# Altium PCB CP2102.PCBDOC
Units mm, origin at the board's own origin, x right, y up, seen from the top; angles counter-clockwise.
Board outline 33.57 x 19.1 mm, 2 copper layers (Top Layer, Bottom Layer); 12 components, 0 nets, 59 pads, 4 vias.
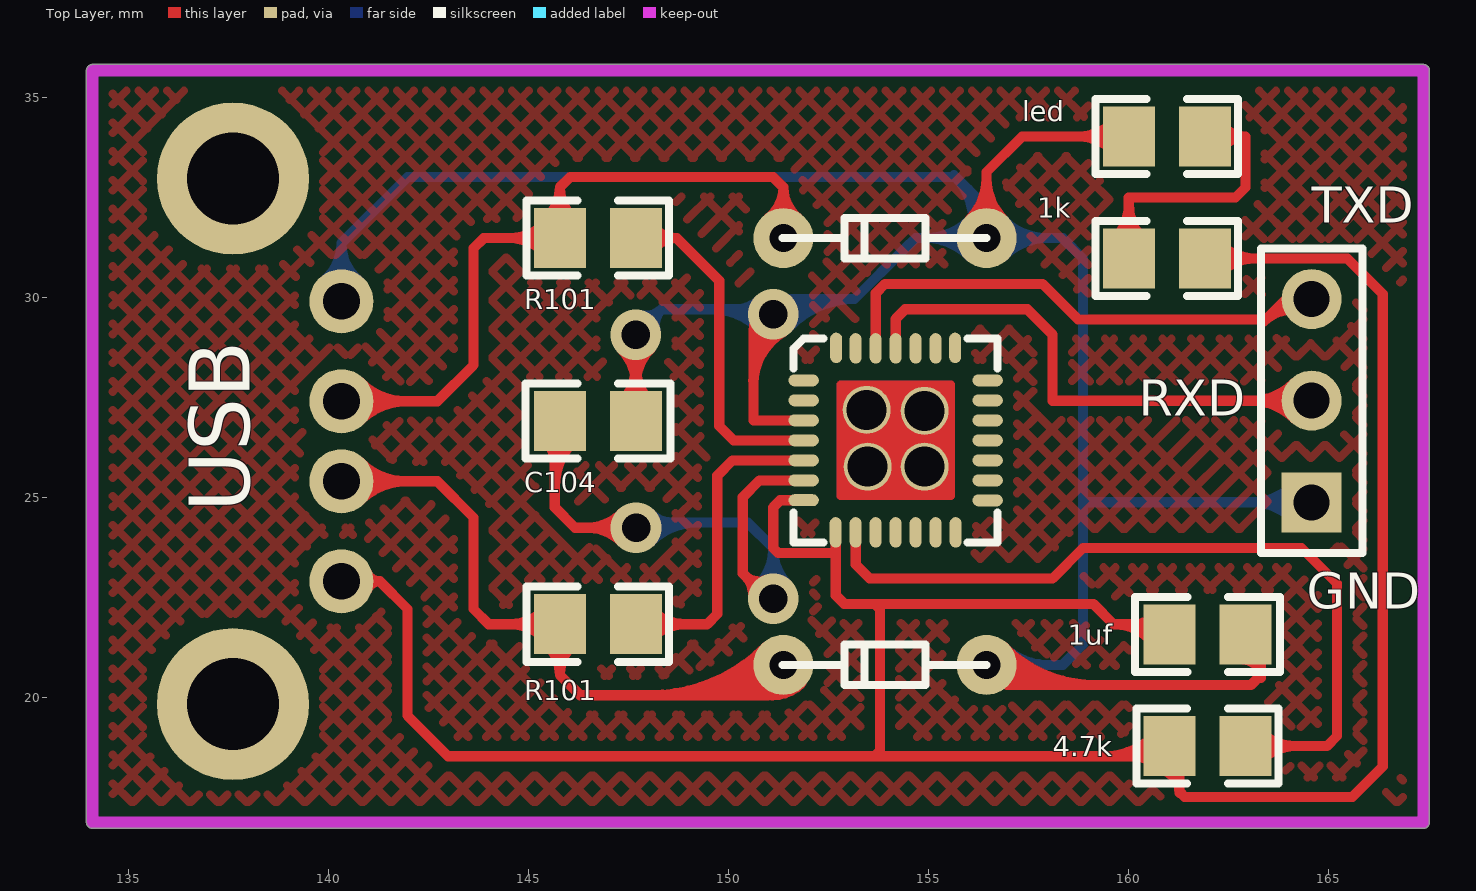
[diagram p0: Top Layer view]
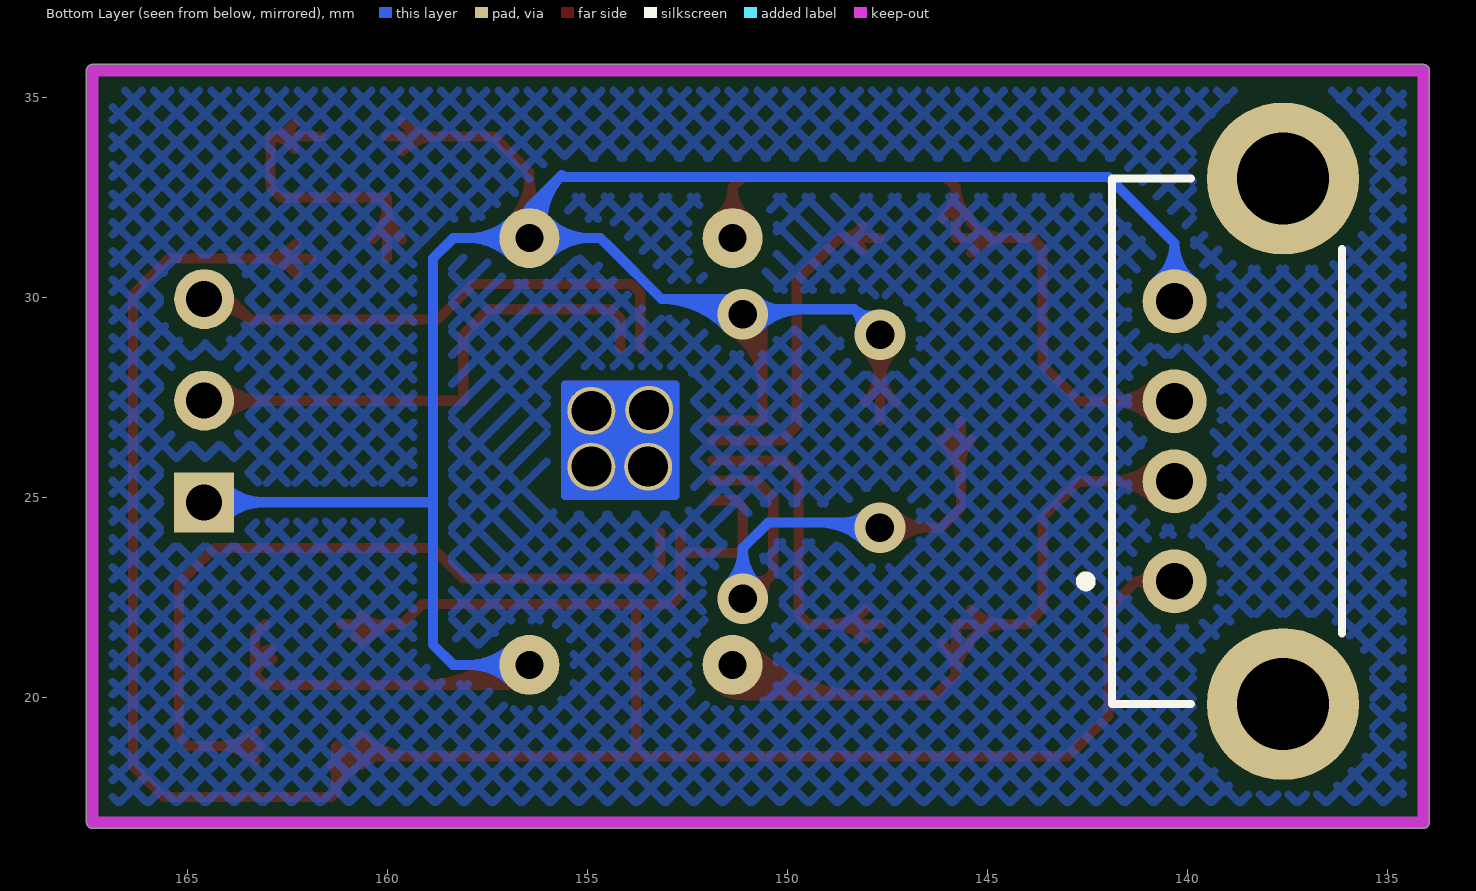
[diagram p1: Bottom Layer view, seen from below]

## Layer stack, top to bottom
Top Layer: signal copper 0.0356
Dielectric: dielectric 0.32, FR-4, Dk 4.8
Bottom Layer: signal copper 0.0356

## Board outline
133.962,16.891 ccw(c134.112,16.891) 134.112,16.741 167.386,16.741 ccw(c167.386,16.891) 167.536,16.891 167.536,35.687 ccw(c167.386,35.687) 167.386,35.837 134.112,35.837 ccw(c134.112,35.687) 133.962,35.687

## Design rules (kind name [scope] priority, off if disabled: settings)
Clearance [All] p1: gap=0.254
ComponentClearance [All] p1: gap=0.254 collisioncheckmode=3 verticalgap=0.254
PolygonConnect [All] p1: connectstyle=Relief reliefconductorwidth=0.254 reliefentries=4 polygonreliefangle="90 Angle"
RoutingVias [All] p1: holewidth=0.711 width=1.27 viastyle="Through Hole" minholewidth=0.711 minwidth=1.27 maxholewidth=0.711 maxwidth=1.27
SolderMaskExpansion [All] p1: expansion=0.102
TestPointUsage [All] p1: valid=0 allowmultiple=FALSE
Testpoint [All] p1: side=15 testpointundercomponent=TRUE minsize=1.016 maxsize=2.54 preferedsize=1.524 minholesize=0 maxholesize=1.016 preferedholesize=0.813 testpointgrid=0.025 style=1023 order=0-112345678
Width [All] p1: maxlimit=0.254 minlimit=0.254 preferedwidth=0.254
17 further rules are at their usual default settings.

## Components (designator, comment, footprint, x,y, rotation, side; value= is the part's Value field where it differs from the comment)
1k "Comment" R-0805 160.02,30.988 r0 top
1uf "Comment" C-0805 162.941,21.59 r180 top
4.7k "Comment" R-0805 161.036,18.796 r0 top
C104 "Comment" C-0805 145.796,26.924 r0 top
led "Comment" R-0805 160.02,34.036 r0 top
R101 "Comment" R-0805 145.796,21.844 r0 top
R101 "Comment" R-0805 145.796,31.496 r0 top
? "Comment" LCC28 151.892,27.94 r0 top
? "Comment" HDR1X3 164.592,24.892 r90 top
? "Comment" D-3 156.464,31.496 r180 top
? "Comment" D-3 156.464,20.828 r180 top
? "Comment" USB2.5-2V4A 136.144,26.416 r180 bottom

## Footprints (in the part's own frame and the unit in brackets; to place one, negate y for a bottom-side part, rotate by r counter-clockwise, add the part's x,y. Pads: shape width x height; smd on the part's side, far side on the other; paste and mask are expansions set on the pad)
C-0805 [mm]
  rect 1.3x1.5 smd: 1(0,0) 2(1.9,0)
  silkscreen extent -0.85,-0.94 2.77,0.94
D-3 [mm]
  round 1.5 hole 0.7: A(0,0) K(5.08,0)
  silkscreen extent 0,-0.51 5.1,0.51
HDR1X3 [mm] "Connector; Header; 3 Position"
  rect 1.5x1.5 hole 0.9: 1(0,0)
  round 1.5 hole 0.9: 2(2.54,0) 3(5.08,0)
  silkscreen extent -1.27,-1.27 6.35,1.27
LCC28 [mm]
  oval 0.76x0.3 smd: 1(0,0) 2(0,-0.5) 3(0,-1) 4(0,-1.5) 5(0,-2) 6(0,-2.5) 7(0,-2.997) 15(4.6,-3) 16(4.6,-2.5) 17(4.6,-2) 18(4.6,-1.5) 19(4.6,-1) 20(4.6,-0.5) 21(4.6,0)
  oval 0.3x0.76 smd: 8(0.8,-3.8) 9(1.3,-3.8) 10(1.8,-3.8) 11(2.3,-3.8) 12(2.8,-3.8) 13(3.3,-3.8) 14(3.8,-3.8) 22(3.785,0.813) 23(3.3,0.8) 24(2.8,0.8) 25(2.3,0.8) 26(1.8,0.8) 27(1.3,0.8) 28(0.813,0.813)
  round 1.2 hole 1: 29(1.575,-0.737) 30(3.023,-0.762) 31(3.023,-2.159) 32(1.6,-2.159)
  Multi-Layer region: 0.914,-2.896 3.683,-2.896 3.683,-0.102 0.914,-0.102
  Multi-Layer lines w0.2: 0.914,-2.438 0.914,-2.464 1.346,-2.896 ; 0.914,-2.337 0.914,-2.362 1.448,-2.896 ; 0.914,-1.854 1.346,-1.422 ; 0.914,-1.372 2.083,-1.372 ; 0.914,-1.092 1.016,-1.092 ; 0.914,-0.965 0.914,-0.991 1.016,-1.092 ; 0.914,-0.559 0.914,-0.508 1.321,-0.102 ; 1.016,-1.651 1.016,-1.549 1.194,-1.372 ; 1.067,-0.254 1.067,-0.102 ; 1.097,-1.672 1.198,-1.672 ; 1.157,-2.707 1.132,-2.707 ; 1.168,-2.896 0.914,-2.642 0.914,-2.286 1.071,-2.443 1.071,-2.646 ; 1.202,-2.752 1.871,-2.752 2.134,-2.489 2.21,-2.489 ; 1.221,-1.624 1.297,-1.624 1.499,-1.422 ; 1.249,-2.646 1.071,-2.646 ; 1.361,-1.483 1.814,-1.483 2.235,-1.905 ; 1.473,-1.372 1.016,-1.829 1.016,-2.007 1.016,-1.092 ; 1.651,-1.422 1.702,-1.372 1.905,-1.168 ; 1.803,-2.845 2.21,-2.438 2.21,-2.362 ; 1.829,-1.372 1.88,-1.372 2.21,-1.041 ; 1.905,-0.102 1.905,-0.152 2.311,-0.559 ; 2.108,-0.102 2.108,-0.254 2.184,-0.33 ; 2.159,-1.626 2.083,-1.626 1.88,-1.422 ; 2.184,-2.896 2.395,-2.896 2.586,-2.755 3.498,-2.755 ; 2.21,-2.845 2.21,-0.102 ; 2.21,-2.616 2.007,-2.616 ; 2.362,-2.896 2.362,-0.152 2.769,-0.152 2.819,-0.102 ; 2.362,-2.515 2.464,-2.515 ; 2.362,-2.464 2.286,-2.464 1.905,-2.845 ; 2.362,-2.362 2.362,-2.667 2.54,-2.845 ; 2.362,-2.337 2.464,-2.438 ; 2.362,-2.286 2.464,-2.388 2.464,-2.438 ; 2.362,-2.235 2.362,-2.388 1.905,-2.845 ; 2.362,-1.93 2.492,-1.724 2.362,-1.803 ; 2.362,-1.905 2.362,-1.854 2.769,-1.448 ; 2.362,-1.372 2.692,-1.372 ; 2.362,-1.346 2.743,-1.346 2.87,-1.346 ; 2.362,-1.168 2.489,-1.168 ; 2.362,-0.965 2.845,-1.448 ; 2.362,-0.914 2.362,-1.041 ; 2.362,-0.635 2.362,-0.483 2.743,-0.102 ; 2.362,-0.457 2.362,-0.356 2.616,-0.102 ; 2.413,-2.845 2.413,-2.743 2.362,-2.692 2.667,-2.692 2.819,-2.845 3.353,-2.845 ; 2.455,-0.389 2.455,-0.44 2.362,-0.533 2.362,-1.041 ; 2.525,-1.692 2.601,-1.692 2.845,-1.448 ; 2.794,-2.845 2.464,-2.515 ; 3.15,-1.524 3.302,-1.524 3.683,-1.905 ; 3.15,-1.448 3.327,-1.448 3.683,-1.803 ; 3.2,-2.896 3.683,-2.413 3.683,-1.93 ; 3.226,-0.102 3.48,-0.356 ; 3.251,-0.102 3.302,-0.102 3.683,-0.483 ; 3.277,-1.372 3.683,-0.965 3.683,-0.813 ; 3.404,-1.524 2.692,-1.524 2.21,-1.524 2.108,-1.422 1.88,-1.422 ; 3.479,-1.599 3.479,-1.752 3.683,-1.956 ; 3.48,-0.102 3.48,-0.356 ; 3.505,-0.102 3.683,-0.279 3.683,-1.092 3.658,-1.092 3.302,-1.448 ; 3.531,-2.591 3.683,-2.591 ; 3.599,-2.896 3.683,-2.896 ; 3.658,-0.533 3.48,-0.356 ; 3.683,-2.515 3.353,-2.845 ; 3.683,-2.337 3.498,-2.522 3.498,-2.755 ; 3.683,-1.651 3.683,-1.626 3.505,-1.448 2.845,-1.448 ; 3.683,-1.448 3.302,-1.448 ; 3.683,-1.219 3.531,-1.372 2.692,-1.372 ; 1.016,-1.092 1.346,-1.422 ; 1.071,-2.646 1.132,-2.707 ; 1.132,-2.707 1.31,-2.707 1.448,-2.845 3.353,-2.845 ; 1.346,-1.422 1.88,-1.422 ; 1.905,-2.845 1.905,-2.718 2.007,-2.616 ; 2.007,-2.616 1.778,-2.845 2.007,-2.616 ; 2.362,-1.041 2.692,-1.372 ; 2.362,-1.041 2.489,-1.168 ; 2.464,-2.515 2.464,-2.438 ; 2.489,-1.168 2.769,-1.448 ; 2.769,-1.448 3.302,-1.448 ; 2.845,-1.448 3.302,-1.448 ; 3.498,-2.755 3.683,-2.889 3.683,-2.896 ; 3.683,-2.896 3.683,-0.102 0.914,-0.102 0.914,-2.896 3.683,-2.896
  silkscreen extent -0.25,-4.05 4.85,1.05
R-0805 [mm]
  rect 1.3x1.5 smd: 1(0,0) 2(1.9,0)
  silkscreen extent -0.83,-0.94 2.73,0.94
USB2.5-2V4A [mm] "Connector; USB1.1, Type A, Thru-Hole; 4 Position; Vertical"
  round 1.6 hole 0.92: 1(-4.19,-3.5) 2(-4.19,-1) 3(-4.19,1) 4(-4.19,3.5)
  round 3.8 hole 2.3: 5(-1.48,6.57) 6(-1.48,-6.57)
  silkscreen extent -6.54,-6.57 0,6.57

## Via types
v1: diameter 1.27, hole 0.711, Top Layer to Bottom Layer, 4 vias

## Nets (pads, with @x,y where several pads share a name; then routed paths per layer and width w, separated by ;. In a path a pad name is that pad's centre, name@x,y a point inside that pad or via, vN(x,y) a via of type N, cw(c..) or ccw(c..) an arc to the next point about the centre after c; other vN are vias at no path point)
pads on no net: 1k.1 1k.2 1uf.1 1uf.2 4.7k.1 4.7k.2 ?.1 ?.2 ?.3 ?.4 ?.5 ?.6 ?.7 ?.8 ?.9 ?.10 ?.11 ?.12 ?.13 ?.14 ?.15 ?.16 ?.17 ?.18 ?.19 ?.20 ?.21 ?.22 ?.23 ?.24 ?.25 ?.26 ?.27 ?.28 ?.29 ?.30 ?.31 ?.32 ?.A ?.K C104.1 C104.2 led.1 led.2 R101.1 R101.2
copper on no net: | length 372.3
  Top Layer w0.254: 140.334,22.916 141.295,22.916 ; 140.334,25.416 142.224,25.416 142.732,25.416 143.637,24.511 143.637,22.225 144.018,21.844 145.796,21.844 145.796,20.574 ; 140.334,27.416 142.224,27.416 142.732,27.416 143.637,28.321 143.637,31.242 143.891,31.496 145.796,31.496 145.796,32.766 ; 140.63,25.12 cw(c141.346,24.404) 141.346,25.416 cw(c141.346,26.428) 140.63,25.712 ; 140.63,27.12 cw(c141.346,26.404) 141.346,27.416 cw(c141.346,28.428) 140.63,27.712 ; 140.81,24.94 cw(c141.959,23.791) 141.959,25.416 cw(c141.959,27.041) 140.81,25.892 ; 140.81,26.94 cw(c141.959,25.791) 141.959,27.416 cw(c141.959,29.041) 140.81,27.892 ; 140.966,22.686 cw(c141.295,22.566) 141.295,22.916 ; 140.966,23.146 ccw(c141.295,23.266) 141.295,22.916 ; 145.426,21.474 ccw(c144.533,20.581) 144.533,21.844 ccw(c144.533,23.107) 145.426,22.214 ; 145.426,26.454 cw(c144.84,25.868) 145.669,25.868 cw(c146.752,25.868) 145.986,26.634 ; 145.426,31.126 ccw(c144.533,30.233) 144.533,31.496 ccw(c144.533,32.759) 145.426,31.866 ; 145.447,21.354 cw(c144.749,20.574) 145.796,20.574 ; 145.447,31.986 ccw(c144.749,32.766) 145.796,32.766 ; 145.669,25.255 cw(c147.365,25.255) 146.166,26.454 ; 145.669,26.924 145.669,24.765 146.177,24.257 v1(147.701,24.257) ; 146.145,21.354 ccw(c146.843,20.574) 145.796,20.574 ; 146.145,31.986 cw(c146.843,32.766) 145.796,32.766 ; 147.326,27.394 ccw(c146.433,28.287) 147.696,28.287 ccw(c148.959,28.287) 148.066,27.394 ; v1@147.337,28.719 cw(c146.47,27.852) 147.696,27.852 cw(c148.922,27.852) v1@148.055,28.719 ; v1@147.342,23.898 ccw(c146.475,23.031) 146.475,24.257 ccw(c146.475,25.483) v1@147.342,24.616 ; 147.696,21.844 149.479,21.844 149.733,22.098 149.733,25.559 150.114,25.94 151.892,25.94 ; 147.696,26.924 v1(147.696,29.078) ; 147.696,31.496 148.717,31.496 ; 148.04,20.066 ccw(c148.04,24.172) 150.943,21.269 ; 148.066,21.474 cw(c148.959,20.581) 148.959,21.844 cw(c148.959,23.107) 148.066,22.214 ; 148.12,31.19 cw(c148.717,30.761) 148.717,31.496 ; 148.12,31.802 ccw(c148.717,32.231) 148.717,31.496 ; 148.654,20.066 ccw(c148.654,23.558) 151.123,21.089 ; 149.267,20.066 ccw(c149.267,22.945) 151.303,20.909 ; 149.88,20.066 ccw(c149.88,22.332) 151.482,20.73 ; 150.493,20.066 ccw(c150.493,21.719) 151.662,20.55 ; 150.622,27.94 150.638,27.924 ; v1@150.624,22.523 ccw(c149.961,22.58) 150.432,23.05 ccw(c150.761,23.38) v1@150.937,22.949 ; 150.638,27.853 cw(c152.14,27.853) v1@151.385,29.152 ; 150.638,28.294 cw(c151.884,28.294) v1@151.258,29.371 ; 150.638,28.736 cw(c151.627,28.736) v1(151.13,29.591) 150.638,29.099 ; 150.638,29.177 cw(c151.37,29.177) v1@151.002,29.811 ; v1@150.678,29.358 cw(c150.481,29.256) 150.638,29.099 ; v1@150.749,22.733 150.368,23.114 150.368,25.019 150.789,25.44 151.892,25.44 ; v1@150.897,29.139 ccw(c150.795,28.942) 150.638,29.099 ; 151.003,31.989 ccw(c150.401,32.766) 151.384,32.766 ; 151.106,20.066 ccw(c151.106,21.106) 151.841,20.371 ; 151.158,31.788 ccw(c150.802,32.248) 151.384,32.248 ccw(c151.966,32.248) 151.61,31.788 ; 151.384,20.828 151.384,20.447 151.003,20.066 146.304,20.066 145.796,20.574 ; 151.384,31.496 151.384,32.766 ; 151.765,31.989 cw(c152.367,32.766) 151.384,32.766 ; 151.892,24.943 151.308,24.943 151.13,24.765 151.13,23.749 151.257,23.622 152.4,23.622 152.692,23.622 ; 151.892,26.44 150.138,26.44 149.781,26.797 149.781,30.432 148.717,31.496 ; 151.892,26.94 150.638,26.94 150.638,27.924 ; 152.692,22.949 152.692,24.14 ; 152.692,23.114 152.692,22.568 152.908,22.352 155.067,22.352 159.131,22.352 159.639,21.844 ; 153.192,24.14 153.192,23.338 153.543,22.987 158.115,22.987 158.877,23.749 160.782,23.749 163.068,23.749 ; 153.67,22.352 153.797,22.225 153.797,21.844 153.797,19.05 153.797,18.669 ; 153.692,28.74 153.692,30.121 153.924,30.353 157.861,30.353 158.75,29.464 163.449,29.464 163.957,29.972 164.592,29.972 ; 154.192,28.74 154.192,29.478 154.432,29.718 157.48,29.718 158.115,29.083 158.115,27.432 164.592,27.432 ; 156.023,31.937 ccw(c154.96,33) 156.464,33 ccw(c157.968,33) 156.905,31.937 ; 156.203,31.757 ccw(c155.573,32.387) 156.464,32.387 ccw(c157.355,32.387) 156.725,31.757 ; 156.366,20.73 ccw(c157.355,21.719) 157.355,20.32 ; 156.464,20.828 156.972,20.32 163.068,20.32 163.322,20.574 163.322,21.59 163.068,21.844 ; 156.464,31.496 156.464,33.147 157.353,34.036 160.02,34.036 ; 156.545,20.909 ccw(c157.968,22.332) 157.968,20.32 ; 156.725,21.089 ccw(c158.581,22.945) 158.581,20.32 ; 156.905,21.269 ccw(c159.194,23.558) 159.194,20.32 ; 159.402,18.542 ccw(c159.402,20.33) 160.666,19.066 ; 159.65,31.458 ccw(c158.757,32.351) 160.02,32.351 ccw(c161.283,32.351) 160.39,31.458 ; 159.65,33.666 ccw(c158.757,32.773) 158.757,34.036 ccw(c158.757,35.299) 159.65,34.406 ; 160.015,18.542 ccw(c160.015,19.717) 160.846,18.886 ; 160.02,30.988 160.02,32.512 161.417,32.512 161.798,32.512 162.687,32.512 162.936,32.761 162.936,34.036 ; 160.145,18.542 cw(c160.145,17.805) 160.666,18.326 ; 160.15,21.844 ccw(c160.15,22.581) 160.671,22.06 ; 160.165,21.844 cw(c160.165,20.995) 160.83,21.523 ; 160.631,21.365 ccw(c159.639,20.577) 159.639,21.844 ; 160.873,18.199 cw(c160.683,17.623) 161.29,17.623 ; 160.952,18.44 cw(c160.798,17.973) 161.29,17.973 ; 161.168,21.844 159.639,21.844 ; 161.29,18.047 cw(c161.685,18.047) 161.406,18.326 ; 161.671,34.036 162.936,34.036 ; 161.92,30.988 165.481,30.988 166.37,30.099 166.37,18.288 165.608,17.526 161.417,17.526 161.29,17.653 161.29,18.796 161.036,18.542 153.67,18.542 ; 162.29,30.618 cw(c163.183,29.725) 163.183,30.988 cw(c163.183,32.251) 162.29,31.358 ; 162.346,33.732 cw(c162.936,33.311) 162.936,34.036 ; 162.346,34.34 ccw(c162.936,34.761) 162.936,34.036 ; 162.893,20.969 cw(c162.849,20.498) 163.322,20.498 ; 162.916,21.222 cw(c162.875,20.777) 163.322,20.777 ; 163.19,18.796 164.973,18.796 165.227,19.05 165.227,22.86 164.338,23.749 163.068,23.749 ; 163.195,23.749 163.068,23.749 ; 163.306,18.426 cw(c164.199,17.533) 164.199,18.796 cw(c164.199,20.059) 163.306,19.166 ; 163.402,29.417 cw(c164.088,28.732) 164.453,29.63 ; 163.673,29.688 cw(c164.245,29.117) 164.549,29.865 ; 164.151,26.991 ccw(c163.088,25.928) 163.088,27.432 ccw(c163.088,28.936) 164.151,27.873 ; 164.331,27.171 ccw(c163.701,26.541) 163.701,27.432 ccw(c163.701,28.323) 164.331,27.693 ; 141.295,22.916 141.986,22.225 141.986,19.558 143.002,18.542 153.289,18.542 153.67,18.542 ; 145.796,32.766 146.05,33.02 151.13,33.02 151.384,32.766 ; 150.638,27.924 150.638,29.099 ; 153.67,18.542 153.797,18.669 ; 153.67,18.542 153.797,18.669
  Bottom Layer w0.254: 139.899,30.43 ccw(c139.104,31.368) 140.334,31.368 ; 140.063,30.236 ccw(c139.568,30.82) 140.334,30.82 ccw(c141.1,30.82) 140.605,30.236 ; 140.334,29.916 140.334,31.368 ; 140.769,30.43 cw(c141.564,31.368) 140.334,31.368 ; v1(147.696,29.078) 148.336,29.718 ; v1(147.701,24.257) 147.828,24.384 150.495,24.384 151.13,23.749 v1(151.13,22.479) ; v1@147.816,29.572 ccw(c147.945,30.108) 148.336,29.718 ; v1@147.881,24.077 cw(c148.621,23.337) 148.621,24.384 cw(c148.621,25.177) v1@148.06,24.616 ; v1@148.06,23.898 cw(c149.234,22.724) 149.234,24.384 ; v1@148.19,29.198 cw(c148.726,29.327) 148.336,29.718 ; 149.597,29.718 cw(c149.597,28.058) v1@150.771,29.232 ; v1@150.771,22.838 ccw(c149.904,23.705) 151.13,23.705 ccw(c152.356,23.705) v1@151.489,22.838 ; v1@150.771,29.95 cw(c150.21,30.511) 150.21,29.718 cw(c150.21,28.671) v1@150.95,29.411 ; v1@151.317,29.419 cw(c152.581,28.25) 152.581,29.972 ; v1@151.503,29.246 cw(c153.162,27.713) 153.162,29.972 ; 152.001,29.972 ccw(c152.001,28.786) v1(151.13,29.591) ; 155.654,33.068 cw(c154.49,31.903) 156.103,31.571 ; 155.987,32.735 cw(c155.042,31.789) 156.351,31.519 ; 156.023,31.055 ccw(c154.96,29.992) 154.96,31.496 ccw(c154.96,33) 156.023,31.937 ; 156.203,31.235 ccw(c155.573,30.605) 155.573,31.496 ccw(c155.573,32.387) 156.203,31.757 ; 156.321,32.401 cw(c155.595,31.675) 156.6,31.468 ; 156.34,32.107 ccw(c156.31,32.258) 156.464,32.258 ; 156.464,20.828 158.115,20.828 158.369,20.828 158.877,21.336 158.877,21.59 158.877,30.226 158.877,30.988 158.369,31.496 156.464,31.496 ; 156.588,32.107 cw(c156.618,32.258) 156.464,32.258 ; 156.725,20.567 cw(c157.355,19.937) 157.355,20.828 cw(c157.355,21.719) 156.725,21.089 ; 156.725,31.235 cw(c157.355,30.605) 157.355,31.496 cw(c157.355,32.387) 156.725,31.757 ; 156.905,20.387 cw(c157.968,19.324) 157.968,20.828 cw(c157.968,22.332) 156.905,21.269 ; 156.905,31.055 cw(c157.968,29.992) 157.968,31.496 cw(c157.968,33) 156.905,31.937 ; 158.877,24.892 164.592,24.892 ; 164.151,24.451 ccw(c163.088,23.388) 163.088,24.892 ccw(c163.088,26.396) 164.151,25.333 ; 164.331,24.631 ccw(c163.701,24.001) 163.701,24.892 ccw(c163.701,25.783) 164.331,25.153 ; 140.334,31.368 141.986,33.02 155.702,33.02 156.464,32.258 ; 148.336,29.718 151.003,29.718 v1(151.13,29.591) ; v1(151.13,29.591) 151.511,29.972 153.162,29.972 ; 153.162,29.972 154.432,31.242 154.686,31.496 156.464,31.496 ; 156.464,31.496 156.464,32.258

## Polygon pours and split planes (outlines as drawn)
no net on Top Layer (hatched 45Degree grid 0.508 track 0.203): 134.62,35.179 134.62,17.399 166.878,17.399 166.878,35.179
no net on Bottom Layer (hatched 45Degree grid 0.508 track 0.203): 134.62,35.179 134.62,17.399 166.878,17.399 166.878,35.179

## Keep-outs
Keep-Out Layer:
  lines w0.3: 134.112,16.891 167.386,16.891 167.386,35.687 134.112,35.687 134.112,16.891

## Silkscreen, mask and mechanical layers (free items; w line width, h text height)
Top Overlay:
  text "TXD" at 164.592,31.877 h0.9
  text "RXD" at 160.274,27.051 h0.9
  text "USB" at 138.049,24.638 h1.52 r90
  text "GND" at 164.465,22.225 h0.9
Bottom Paste:
  lines w0.254: 162.433,24.765 163.322,24.765